# Altium PCB V_1.PcbDoc
Units mm, origin at the board's own origin, x right, y up, seen from the top; angles counter-clockwise.
Board outline 70 x 20 mm, 3 copper layers (Top Layer, GND, Bottom Layer), stack 0.488 mm thick; 4 components, 19 nets, 70 pads, 28 vias.
Unrouted connection lines stored in the file: 2.
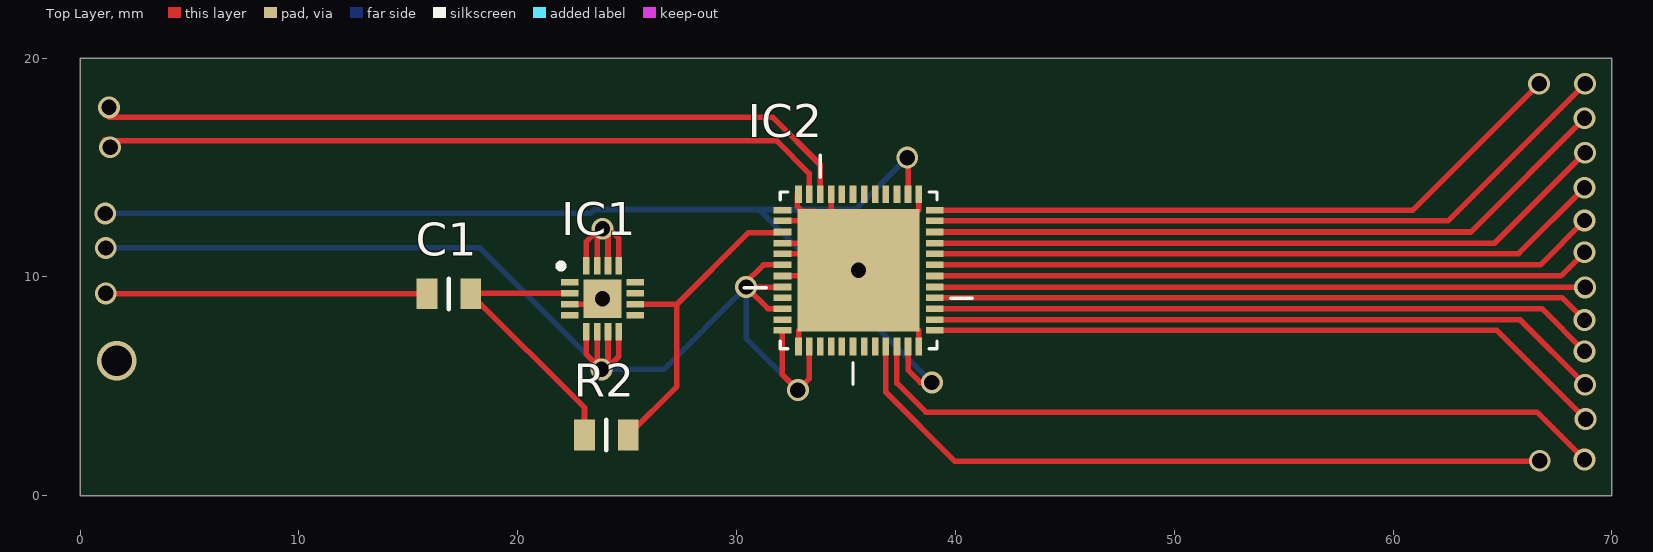
[diagram p0: Top Layer view]
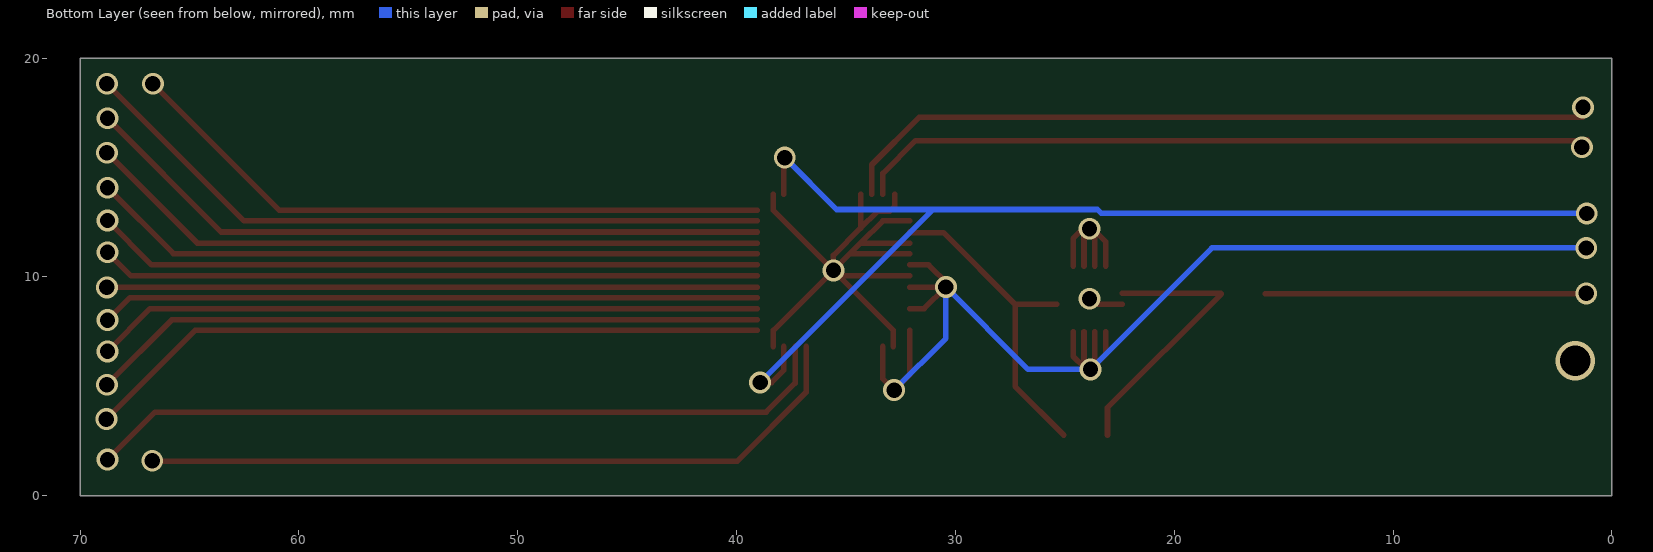
[diagram p1: Bottom Layer view, seen from below]
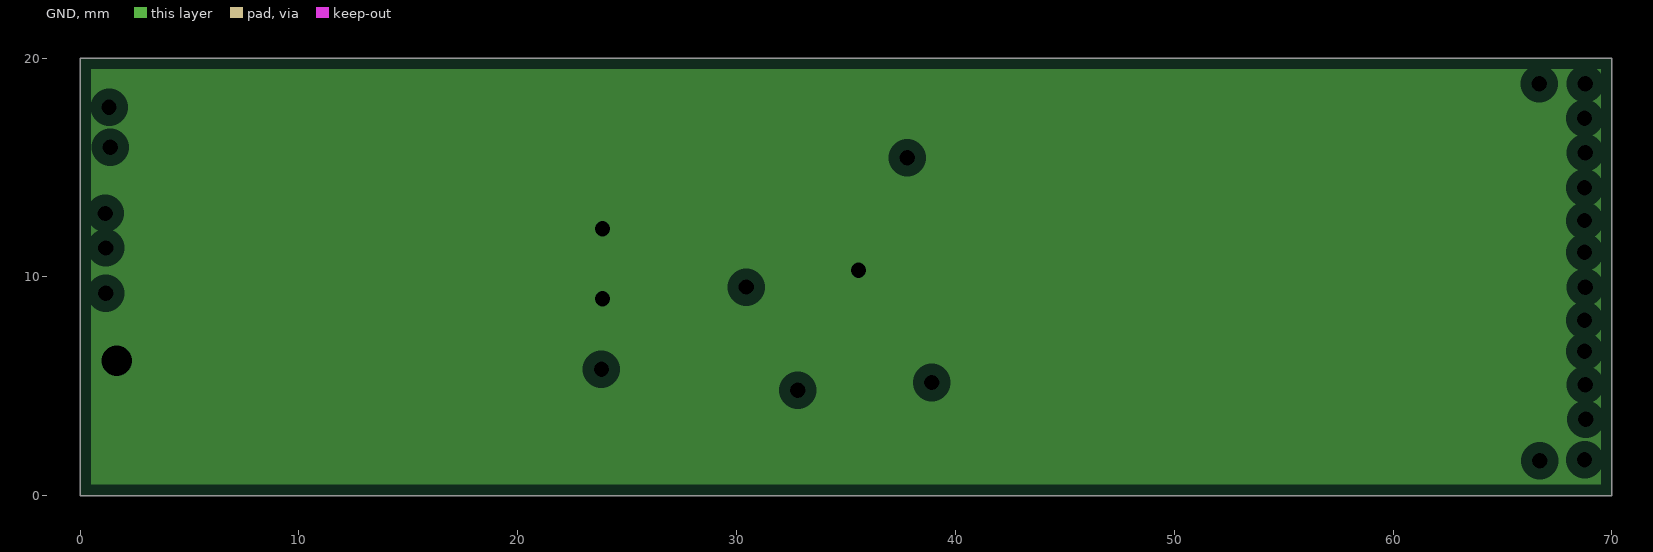
[diagram p2: GND, clearances drawn from the general rule]
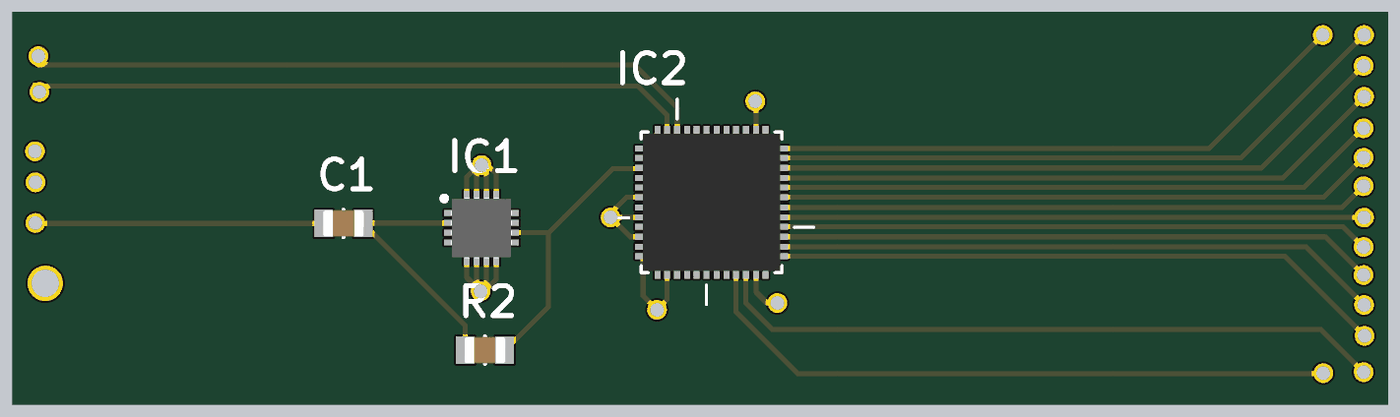
[diagram p3: 3D render of the assembled board from above, using the file's embedded part models]

## Layer stack, top to bottom
Top Solder: solder mask 0.0102, Solder Resist, Dk 3.5
Top Layer: signal copper 0.0356
Dielectric1: core 0.254, FR-4, Dk 4.2
GND: plane copper 0.036, net GND
Dielectric 2: prepreg 0.127, Dk 4.2
Bottom Layer: signal copper 0.0356
Bottom Solder: solder mask 0.0102, Solder Resist, Dk 3.5

## Board outline
0,0 70,0 70,20 0,20

## Design rules (kind name [scope] priority, off if disabled: settings)
Clearance [All] p1: gap=0.254 ignorepadtopadclearanceinfootprint=FALSE except(0: Arc-Hole Track-Hole SMDPad-Hole THPad-Hole Via-Hole Fill-Hole Poly-Hole Region-Hole Text-Hole)
PlaneClearance [All] p1: clearance=0.508
PlaneConnect [All] p1: planeconnectstyle=Relief reliefexpansion=0.508 reliefentries=4 reliefconductorwidth=0.254 reliefairgap=0.254
PolygonConnect [All] p1: connectstyle=Relief reliefconductorwidth=0.254 reliefentries=4 polygonreliefangle="90 Angle" airgapwidth=0.254
RoutingVias [All] p1: holewidth=0.711 width=1.27 viastyle="Through Hole" minholewidth=0.711 minwidth=1.27 maxholewidth=0.711 maxwidth=1.27
SilkToSolderMaskClearance SilkscreenOverComponentPads [IsPad] p1: minsilkscreentomaskgap=0.254 clearancetoexposedcopper=TRUE
SolderMaskExpansion [All] p1: expansion=0.102
Width [All] p1: maxlimit=0.254 minlimit=0.254 preferedwidth=0.254
27 further rules are at their usual default settings.

## Components (designator, comment, footprint, x,y, rotation, side; value= is the part's Value field where it differs from the comment)
C1 "Copasitor" Copasitor 16.275,8.625 r0 top
IC1 "ADA4932-1_4932-2" ADA4932-1 23.875,9 r0 top
IC2 "ADS61B49" ADS61b49 35.575,10.3 r270 top
R2 "Resistor" Resistor 23.475,2.175 r0 top

## Footprints (in the part's own frame and the unit in brackets; to place one, negate y for a bottom-side part, rotate by r counter-clockwise, add the part's x,y. Pads: shape width x height; smd on the part's side, far side on the other; paste and mask are expansions set on the pad)
ADA4932-1 [mm]
  rect 0.8x0.3 smd: 1(-1.5,0.75) 2(-1.5,0.25) 3(-1.5,-0.25) 4(-1.5,-0.75) 9(1.5,-0.75) 10(1.5,-0.25) 11(1.5,0.25) 12(1.5,0.75)
  rect 0.3x0.8 smd: 5(-0.75,-1.5) 6(-0.25,-1.5) 7(0.25,-1.5) 8(0.75,-1.5) 13(0.75,1.5) 14(0.25,1.5) 15(-0.25,1.5) 16(-0.75,1.5)
  rect 1.75x1.75 smd: 17(0,0)
  silkscreen extent -2.02,1.38 -1.77,1.62, body extent -1.55,-1.55 1.55,1.55, height 0.8
ADS61b49 [mil]
  rect 32x12 smd: 1(-137,108) 2(-137,89) 3(-137,69) 4(-137,49) 5(-137,30) 6(-137,10) 7(-137,-10) 8(-137,-30) 9(-137,-49) 10(-137,-69) 11(-137,-89) 12(-137,-108) 25(137,-108) 26(137,-89) 27(137,-69) 28(137,-49) 29(137,-30) 30(137,-10) 31(137,10) 32(137,30) 33(137,49) 34(137,69) 35(137,89) 36(137,108)
  rect 12x32 smd: 13(-108,-137) 14(-89,-137) 15(-69,-137) 16(-49,-137) 17(-30,-137) 18(-10,-137) 19(10,-137) 20(30,-137) 21(49,-137) 22(69,-137) 23(89,-137) 24(108,-137) 37(108,137) 38(89,137) 39(69,137) 40(49,137) 41(30,137) 42(10,137) 43(-10,137) 44(-30,137) 45(-49,137) 46(-69,137) 47(-89,137) 48(-108,137)
  rect 220x220 smd: 49(0,0)
  silkscreen extent -207,-206 205,205, body extent -138,-138 138,138, height 39
Copasitor [mm] "0805"
  rect 0.95x1.4 smd: 1(-0.425,0.6) 2(1.575,0.6)
  silkscreen extent 0.58,-0.1 0.58,1.3, body extent -0.47,-0.07 1.63,1.28, height 0.9
Resistor [mm] "0805"
  rect 0.95x1.4 smd: 1(-0.425,0.6) 2(1.575,0.6)
  silkscreen extent 0.58,-0.1 0.58,1.3, body extent -0.47,-0.07 1.63,1.28, height 0.9

## Via types
v1: diameter 1, hole 0.7, Top Layer to Bottom Layer, 27 vias
v2: diameter 1.8, hole 1.4, Top Layer to Bottom Layer, 1 vias

## Nets (pads, with @x,y where several pads share a name; then routed paths per layer and width w, separated by ;. In a path a pad name is that pad's centre, name@x,y a point inside that pad or via, vN(x,y) a via of type N, cw(c..) or ccw(c..) an arc to the next point about the centre after c; other vN are vias at no path point)
+1.8: IC2.2 IC2.35 | length 53
  Top Layer w0.254: v1(37.8,15.45) 37.836,15.414 IC2.2 ; IC2.35 37.836,5.739 38.4,5.175 v1(38.925,5.175)
  Bottom Layer w0.254: v1(1.15,12.9) 23.329,12.9 23.51,13.081 31.019,13.081 ; v1(37.8,15.45) 35.431,13.081 31.019,13.081 ; v1(38.925,5.175) 31.019,13.081
+3.3: IC1.5 IC1.6 IC1.7 IC1.8 IC2.8 IC2.18 IC2.20 IC2.22 IC2.24 IC2.26 | length 57.5
  Top Layer w0.254: IC1.5 23.125,6.475 v1@23.625,5.975 ; IC1.6 v1@23.625,5.975 ; IC1.7 v1@24.125,5.875 ; IC1.8 24.625,6.375 v1@24.125,5.875 ; IC2.24 32.095,5.53 v1(32.8,4.825) 33.314,5.339 IC2.26 ; IC2.22 31.428,8.547 v1(30.437,9.538) ; IC2.20 v1(30.437,9.538) ; IC2.18 31.229,10.554 30.325,9.65 v1(30.437,9.538) ; v1@23.625,5.975 v1(23.825,5.775) 23.925,5.675 v1@24.125,5.875
  Bottom Layer w0.254: v1(1.175,11.325) 18.275,11.325 v1(23.825,5.775) 26.674,5.775 v1(30.437,9.538) 30.437,7.188 v1(32.8,4.825)
d0: IC2.33 | length 33.3
  Top Layer w0.254: IC2.33 36.82,4.73 39.975,1.575 66.675,1.575 v1(66.7,1.6)
d1: IC2.34 | length 34.5
  Top Layer w0.254: IC2.34 37.328,5.147 38.65,3.825 66.575,3.825 v1(68.75,1.65)
d2: IC2.37 | length 31.4
  Top Layer w0.254: IC2.37 64.743,7.557 v1(68.8,3.5)
d3: IC2.38 | length 30.9
  Top Layer w0.254: IC2.38 65.811,8.039 v1(68.775,5.075)
d4: IC2.39 | length 30.5
  Top Layer w0.254: IC2.39 66.803,8.547 v1(68.75,6.6)
d5: IC2.40 | length 30.1
  Top Layer w0.254: IC2.40 67.72,9.055 v1(68.75,8.025)
d6: IC2.41 | length 29.7
  Top Layer w0.254: IC2.41 68.762,9.538 v1(68.775,9.525)
d7: IC2.42 | length 30.1
  Top Layer w0.254: IC2.42 67.671,10.046 v1(68.75,11.125)
d8: IC2.43 | length 30.5
  Top Layer w0.254: IC2.43 66.729,10.554 v1(68.75,12.575)
d9: IC2.44 | length 30.9
  Top Layer w0.254: IC2.44 65.737,11.062 v1(68.75,14.075)
d10: IC2.45 | length 31.4
  Top Layer w0.254: IC2.45 64.645,11.545 v1(68.775,15.675)
d11: IC2.46 | length 31.8
  Top Layer w0.254: IC2.46 63.553,12.053 v1(68.75,17.25)
d12: IC2.47 | length 32.3
  Top Layer w0.254: IC2.47 62.511,12.561 v1(68.775,18.825)
d13: IC2.48 | length 30
  Top Layer w0.254: IC2.48 60.893,13.043 v1(66.675,18.825)
GND: IC1.3 IC1.13 IC1.14 IC1.15 IC1.16 IC1.17 IC2.1 IC2.9 IC2.12 IC2.13 IC2.14 IC2.16 IC2.17 IC2.19 IC2.25 IC2.36 IC2.49 | length 41.7
  Top Layer w0.254: IC1.3 23.625,8.75 v1(23.875,9) ; IC1.16 23.125,11.6 23.625,12.1 IC1.15 ; IC1.14 24.125,12.25 24.625,11.75 IC1.13 ; IC2.19 IC2.49@35.321,10.046 ; IC2.17 IC2.49@34.813,11.062 ; IC2.16 IC2.49@34.33,11.545 ; IC2.14 33.314,12.561 IC2.49@34.33,11.545 ; IC2.12@32.781,13.78 32.781,13.216 33.004,12.992 33.568,12.992 IC2.49@34.33,12.23 ; IC2.25 32.832,7.557 IC2.49@35.321,10.046 ; IC2.9 IC2.49@34.33,12.23 ; IC2.36 38.318,7.557 v1(35.575,10.3) ; IC2.1 38.318,13.043 v1(35.575,10.3) ; IC2.49@34.33,11.545 IC2.49@34.813,11.062 ; IC2.49@34.33,12.23 35.575,10.986 v1(35.575,10.3) ; IC2.49@34.813,11.062 v1(35.575,10.3) ; IC2.49@35.321,10.046 v1(35.575,10.3)
  other v1: 23.875,12.2
  other v2: 1.675,6.175
NetC1_2: C1.2 IC1.2 R2.1 | length 13.1
  Top Layer w0.254: IC1.2 17.875,9.25 C1.2 23.05,4.025 R2.1
NetIC1_10: IC1.10 IC2.15 R2.2 | length 15
  Top Layer w0.254: R2.2 27.275,5 27.275,8.75 ; IC1.10 27.275,8.75 ; IC2.15 32.068,12.025 30.55,12.025 27.275,8.75
pads on no net: C1.1 IC1.1 IC1.4 IC1.9 IC1.11 IC1.12 IC2.3 IC2.4 IC2.5 IC2.6 IC2.7 IC2.10 IC2.11 IC2.21 IC2.23 IC2.27 IC2.28 IC2.29 IC2.30 IC2.31 IC2.32
copper on no net: | length 83.5
  Top Layer w0.254: v1@1.125,16.275 1.175,16.225 31.825,16.225 33.314,14.736 33.314,13.78 ; v1@1.15,17.475 1.325,17.3 31.65,17.3 33.822,15.128 33.822,13.78 ; v1(1.175,9.25) 1.2,9.225 15.85,9.225
  other v1: 1.375,15.925 1.325,17.75

## Polygon pours and split planes (outlines as drawn)
GND on GND (split plane): 69.49,19.49 69.49,0.51 0.51,0.51 0.51,19.49